# Altium PCB 触摸4B开漏.PCBDOC (part 2 of 2)
Units mm, origin at the board's own origin, x right, y up, seen from the top; angles counter-clockwise.
Board outline 63.63 x 54.48 mm, 2 copper layers (Top Layer, Bottom Layer); 18 components, 31 nets, 63 pads, 27 vias.
Unrouted connection lines stored in the file: 1.
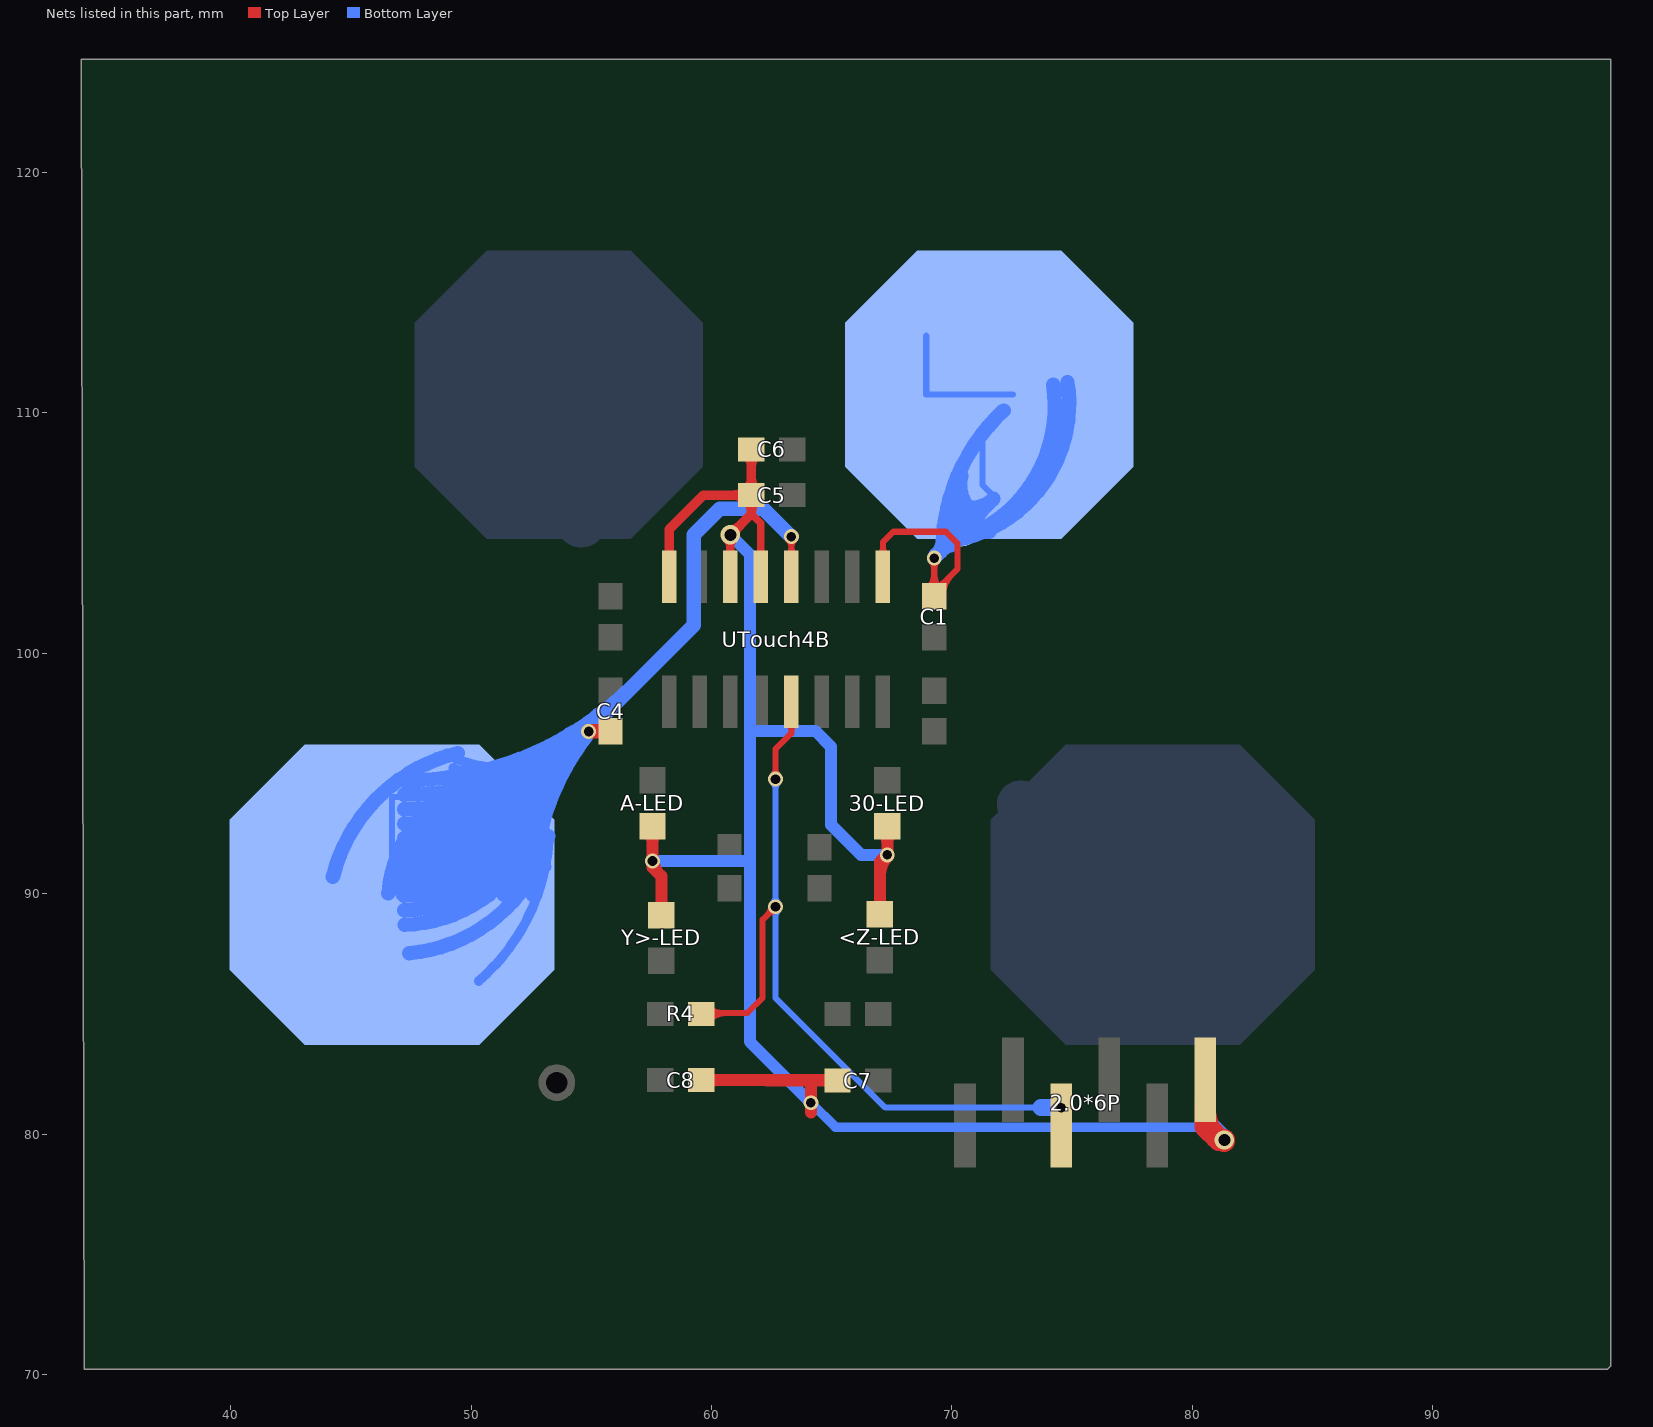
[diagram p2: the nets of this part, all layers, seen from the top]

## Via types
v1: diameter 0.62, hole 0.4, Top Layer to Bottom Layer, 24 vias
v2: diameter 0.8, hole 0.5, Top Layer to Bottom Layer, 2 vias
v3: diameter 0.5, hole 0.35, Top Layer to Bottom Layer, 1 vias

## Nets (pads, with @x,y where several pads share a name; then routed paths per layer and width w, separated by ;. In a path a pad name is that pad's centre, name@x,y a point inside that pad or via, vN(x,y) a via of type N, cw(c..) or ccw(c..) an arc to the next point about the centre after c; other vN are vias at no path point) (continued)
VCC: 2.0*6P.1 30-LED.2 <Z-LED.2 A-LED.2 C5.2 C6.1 C7.1 C8.1 UTouch4B.5 UTouch4B.6 UTouch4B.8 Y>-LED.2 | length 123.5
  Top Layer w0.254: UTouch4B.6@60.782,103.184 v2(60.782,104.927) ; v2@60.589,104.734 cw(c60.123,104.268) UTouch4B.6@60.782,104.268 ; v2@60.589,104.734 cw(c60.123,104.268) UTouch4B.6@60.782,104.268 ; v2@60.589,104.734 cw(c60.123,104.268) UTouch4B.6@60.782,104.268 ; UTouch4B.6@60.647,104.092 ccw(c60.308,104.362) 60.727,104.475 ; UTouch4B.6@60.647,104.092 ccw(c60.308,104.362) 60.727,104.475 ; UTouch4B.6@60.647,104.092 ccw(c60.308,104.362) 60.727,104.475 ; UTouch4B.6@60.782,104.268 cw(c61.441,104.268) v2@60.975,104.734 ; UTouch4B.6@60.782,104.268 cw(c61.441,104.268) v2@60.975,104.734 ; UTouch4B.6@60.782,104.268 cw(c61.441,104.268) v2@60.975,104.734 ; 60.782,104.402 ccw(c61.2,104.402) 60.905,104.106 cw(c61.2,104.402) 60.782,104.402 ; 60.782,104.402 cw(c60.365,104.402) 60.66,104.106 ccw(c60.365,104.402) 60.782,104.402 ; 60.838,104.475 ccw(c61.257,104.362) UTouch4B.6@60.917,104.092 ; 60.838,104.475 ccw(c61.257,104.362) UTouch4B.6@60.917,104.092 ; 60.838,104.475 ccw(c61.257,104.362) UTouch4B.6@60.917,104.092
  Top Layer w0.3: 61.659,105.805 62.052,105.412 UTouch4B.5@62.052,103.184 ; 62.052,104.346 ccw(c62.414,104.346) 62.158,104.09 cw(c62.414,104.346) 62.052,104.346 ; 62.052,104.346 cw(c61.69,104.346) 61.946,104.09 ccw(c61.69,104.346) 62.052,104.346
  Top Layer w0.4: UTouch4B.8@58.242,103.184 58.242,105.156 59.665,106.578 C5.2@61.659,106.578 ; v2(60.782,104.927) 61.659,105.805 C5.2@61.659,106.578 ; C6.1@61.659,108.483 C5.2@61.659,106.578 ; 60.885,106.578 ccw(c60.885,107.303) 61.397,106.791 cw(c60.885,107.303) 60.885,106.578 ; 60.885,106.578 cw(c60.885,105.854) 61.397,106.366 ccw(c60.885,105.854) 60.885,106.578 ; 61.124,105.269 ccw(c61.465,104.927) 60.982,104.927 cw(c61.465,104.927) 61.124,105.269 ; 61.124,105.269 cw(c60.782,105.61) 60.782,105.127 ccw(c60.782,105.61) 61.124,105.269 ; 61.659,105.854 ccw(c60.935,105.854) 61.447,106.366 cw(c60.935,105.854) 61.659,105.854 ; 61.659,105.854 cw(c62.384,105.854) 61.872,106.366 ccw(c62.384,105.854) 61.659,105.854 ; 61.659,107.303 ccw(c62.384,107.303) 61.872,106.791 cw(c62.384,107.303) 61.659,107.303 ; 61.659,107.303 cw(c60.935,107.303) 61.447,106.791 ccw(c60.935,107.303) 61.659,107.303 ; 61.659,107.759 ccw(c60.935,107.759) 61.447,108.271 cw(c60.935,107.759) 61.659,107.759 ; 61.659,107.759 cw(c62.384,107.759) 61.872,108.271 ccw(c62.384,107.759) 61.659,107.759
  Top Layer w0.5: A-LED.2@57.547,92.532 v1(57.547,91.364) 57.547,91.094 57.912,90.729 Y>-LED.2@57.912,89.357 ; C8.1@59.575,82.245 65.227,82.245 C7.1@65.241,82.231 62.281,82.231 ; 64.135,80.899 64.135,82.231 ; <Z-LED.2@67.005,89.357 67.005,91.313 67.315,91.622 30-LED.2@67.315,92.583 ; 67.005,90.737 cw(c68.191,90.737) v1@67.352,91.575 ; 57.547,92.089 ccw(c56.822,92.089) 57.334,92.601 cw(c56.822,92.089) 57.547,92.089 ; 57.547,92.089 cw(c58.271,92.089) 57.759,92.601 ccw(c58.271,92.089) 57.547,92.089 ; 60.228,82.245 ccw(c60.228,81.642) 59.802,82.068 cw(c60.228,81.642) 60.228,82.245 ; 60.228,82.245 cw(c60.228,82.849) 59.802,82.422 ccw(c60.228,82.849) 60.228,82.245 ; 64.587,82.231 ccw(c64.587,82.835) C7.1@65.014,82.408 ; 64.587,82.231 cw(c64.587,81.628) C7.1@65.014,82.055 ; 64.587,82.231 ccw(c64.587,82.835) C7.1@65.014,82.408 ; 64.587,82.231 cw(c64.587,81.628) C7.1@65.014,82.055 ; C7.1@65.014,82.055 ccw(c64.554,81.595) 64.554,82.245 cw(c64.554,81.595) C7.1@65.014,82.055 ; C7.1@65.014,82.408 cw(c64.621,82.802) 64.621,82.245 ccw(c64.621,82.802) C7.1@65.014,82.408 ; 67.315,92.089 ccw(c66.59,92.089) 67.102,92.601 cw(c66.59,92.089) 67.315,92.089 ; 67.315,92.089 cw(c68.039,92.089) 67.527,92.601 ccw(c68.039,92.089) 67.315,92.089 ; v1@57.607,91.364 ccw(c58.402,91.364) 57.84,90.801 cw(c58.402,91.364) v1@57.607,91.364 ; 67.005,91.187 cw(c67.382,91.187) 67.32,91.559 ccw(c67.382,91.187) 67.005,91.187
  Top Layer w0.9: 2.0*6P.1@80.544,80.964 ccw(c82.111,80.964) v2@81.003,79.855 ; 2.0*6P.1@80.543,81.178 80.543,80.315 81.102,79.756 v2(81.331,79.756) ; 80.905,80.024 ccw(c81.494,80.364) v2@81.318,79.708
  Bottom Layer w0.4: v1(64.135,81.305) 65.151,80.289 80.797,80.289
  Bottom Layer w0.5: v1(57.547,91.364) 61.595,91.364 ; v2(60.782,104.927) 61.595,104.115 61.595,96.774 ; v1(64.135,81.305) 61.595,83.845 61.595,91.364 ; v1(67.31,91.618) 66.218,91.618 64.973,92.862 64.973,96.114 64.313,96.774 61.595,96.774 ; 61.595,91.364 61.595,96.774
  Bottom Layer w0.8: 80.797,80.289 v2(81.331,79.756)
Y30-P: C1.1 pad.0@71.547,110.764 pad.2@70.333,105.435 UTouch4B.1 | length 80.7
  Top Layer w0.254: UTouch4B.1@67.132,103.251 67.132,104.623 67.564,105.054 69.748,105.054 70.231,104.572 70.231,103.505 69.093,102.367 C1.1@69.266,102.367 v1(69.266,103.962) ; C1.1@69.002,102.681 ccw(c68.365,103.318) 69.266,103.318 ccw(c70.166,103.318) C1.1@69.53,102.681 ; C1.1@69.266,102.79 ccw(c69.266,103.395) 69.694,102.968 ; C1.1@69.385,102.417 cw(c69.968,102.417) C1.1@69.556,102.83 ; C1.1@69.639,102.417 cw(c70.835,102.417) 69.989,103.263 ; 67.132,104.402 ccw(c67.55,104.402) 67.255,104.106 cw(c67.55,104.402) 67.132,104.402 ; 67.132,104.402 cw(c66.715,104.402) 67.01,104.106 ccw(c66.715,104.402) 67.132,104.402 ; v1@69.136,103.833 cw(c68.824,103.52) 69.266,103.52 ; v1@69.136,103.833 cw(c68.824,103.52) 69.266,103.52 ; v1@69.136,103.833 cw(c68.824,103.52) 69.266,103.52 ; 69.266,103.52 cw(c69.708,103.52) v1@69.395,103.833 ; 69.266,103.52 cw(c69.708,103.52) v1@69.395,103.833 ; 69.266,103.52 cw(c69.708,103.52) v1@69.395,103.833
  Bottom Layer w0.254: pad.0@68.936,113.208 68.936,110.764 pad.0@72.547,110.764 ; pad.0@71.272,108.89 71.272,107.01 71.73,106.553 pad.0@71.73,106.426
  Bottom Layer w0.6: v1@69.327,104.094 ccw(c68.826,104.858) pad.0@69.679,105.185 ; 69.95,104.503 ccw(c69.538,105.131) pad.0@70.239,105.4 ; pad.2@69.952,104.637 ccw(c68.44,110.282) pad.0@74.215,111.178 ; pad.0@70.13,106.448 ccw(c71.024,106.197) pad.0@70.4,105.509 ; pad.0@70.392,107.382 ccw(c71.753,107) pad.0@70.803,105.954 ; pad.0@70.598,104.81 ccw(c69.104,110.385) pad.0@74.808,111.27 ; v1(69.266,103.962) ccw(c68.257,104.971) 69.649,105.283 cw(c68.257,104.971) v1(69.266,103.962) ; v1(69.266,103.962) pad.0@71.73,106.426 ; 69.623,104.643 cw(c77.478,104.314) pad.0@72.156,110.101 ; 69.623,104.643 cw(c77.478,104.314) pad.0@72.156,110.101 ; 69.623,104.643 cw(c77.478,104.314) pad.0@72.156,110.101 ; pad.0@71.73,106.426 cw(c70.855,107.301) 70.521,106.109 ccw(c70.855,107.301) pad.0@71.73,106.426 ; 69.533,104.23 cw(c71.547,102.216) 71.547,105.064 ccw(c71.547,102.216) 69.533,104.23 ; 69.831,104.528 cw(c70.333,104.027) 70.333,104.735 ccw(c70.333,104.027) 69.831,104.528 ; pad.0@71.033,105.435 cw(c71.741,105.435) 71.24,105.937 ccw(c71.741,105.435) pad.0@71.033,105.435
Y>: 2.0*6P.4 R4.1 UTouch4B.13 | length 45.6
  Top Layer w0.254: R4.1@59.575,85.039 61.493,85.039 62.128,85.674 62.128,88.925 v1(62.662,89.459) ; R4.1@59.889,84.736 cw(c60.62,84.005) 60.62,85.039 ; R4.1@59.889,85.264 ccw(c60.431,85.806) 60.431,85.039 ; v1(62.662,94.767) 62.662,96.012 63.322,96.672 UTouch4B.13@63.322,97.984 ; 62.349,89.146 ccw(c62.037,89.459) v1@62.479,89.459 ; 62.349,89.146 cw(c62.662,88.834) v1@62.662,89.276 ; 62.349,89.146 ccw(c62.041,89.457) v1@62.479,89.458 ; 62.349,89.146 ccw(c62.037,89.459) v1@62.479,89.459 ; 62.349,89.146 cw(c62.662,88.834) v1@62.662,89.276 ; 62.349,89.146 cw(c62.66,88.838) v1@62.661,89.276 ; 62.352,89.149 cw(c62.66,88.84) v1@62.661,89.276 ; 62.352,89.149 ccw(c62.049,89.454) v1@62.479,89.457 ; 62.352,89.149 cw(c62.66,88.84) v1@62.661,89.276 ; 62.352,89.149 ccw(c62.043,89.457) v1@62.479,89.458 ; 62.352,89.149 cw(c62.657,88.846) v1@62.66,89.276 ; 62.352,89.149 ccw(c62.043,89.457) v1@62.479,89.458 ; 62.662,95.209 ccw(c63.104,95.209) 62.791,94.897 cw(c63.104,95.209) 62.662,95.209 ; 62.662,95.209 cw(c62.22,95.209) 62.532,94.897 ccw(c62.22,95.209) 62.662,95.209 ; 63.322,96.766 ccw(c62.905,96.766) 63.2,97.062 cw(c62.905,96.766) 63.322,96.766 ; 63.322,96.766 cw(c63.74,96.766) 63.445,97.062 ccw(c63.74,96.766) 63.322,96.766
  Bottom Layer w0.254: v1(62.662,94.767) 62.662,85.674 67.234,81.102 68.332,81.102 73.711,81.102 ; 62.662,89.017 ccw(c62.22,89.017) 62.532,89.329 cw(c62.22,89.017) 62.662,89.017 ; 62.662,89.017 cw(c63.104,89.017) 62.791,89.329 ccw(c63.104,89.017) 62.662,89.017 ; 62.662,89.901 ccw(c63.104,89.901) 62.791,89.588 cw(c63.104,89.901) 62.662,89.901 ; 62.662,89.901 cw(c62.22,89.901) 62.532,89.588 ccw(c62.22,89.901) 62.662,89.901 ; 62.662,94.326 ccw(c62.22,94.326) 62.532,94.638 cw(c62.22,94.326) 62.662,94.326 ; 62.662,94.326 cw(c63.104,94.326) 62.791,94.638 ccw(c63.104,94.326) 62.662,94.326
  Bottom Layer w0.7: 73.711,81.102 v1@74.524,81.102
  other v1: 74.549,81.102
Y>-P: C4.1 pad.0@46.711,89.964 pad.1@51.968,93.929 UTouch4B.4 | length 879.7
  Top Layer w0.254: v1@55.02,96.621 cw(c55.333,96.308) 55.333,96.75 cw(c55.333,97.192) v1@55.02,96.879 ; C4.1@55.8,96.75 C4.1@56.007,96.75 ; UTouch4B.4@63.322,103.184 v1(63.322,104.851) ; v1@63.193,104.722 cw(c62.88,104.409) 63.322,104.409 ; v1@63.193,104.722 cw(c62.88,104.409) 63.322,104.409 ; v1@63.193,104.722 cw(c62.88,104.409) 63.322,104.409 ; 63.322,104.402 ccw(c63.74,104.402) 63.445,104.106 cw(c63.74,104.402) 63.322,104.402 ; 63.322,104.402 cw(c62.905,104.402) 63.2,104.106 ccw(c62.905,104.402) 63.322,104.402 ; 63.322,104.409 cw(c63.764,104.409) v1@63.452,104.722 ; 63.322,104.409 cw(c63.764,104.409) v1@63.452,104.722 ; 63.322,104.409 cw(c63.764,104.409) v1@63.452,104.722
  Top Layer w0.6: v1(54.891,96.75) C4.1@55.8,96.75
  Bottom Layer w0.254: pad.0@46.711,89.964 46.711,94.031 pad.1@52.172,94.031 ; pad.1@52.026,94.322 cw(c51.866,93.228) pad.0@52.941,93.484 ; pad.1@52.108,94.018 52.959,93.167 pad.0@53.2,93.002 ; pad.0@52.547,92.564 53.093,93.11 pad.0@52.997,93.205 ; 54.492,96.402 cw(c54.891,96.003) v1@54.891,96.567 ; 54.614,96.524 ccw(c54.389,96.75) v1@54.708,96.75 ; v1@54.891,96.933 ccw(c54.891,97.252) 55.117,97.027 ; v1@55.074,96.75 cw(c55.638,96.75) 55.239,97.149 ; pad.1@52.172,94.031 pad.0@53.2,93.002 ; pad.1@52.172,94.031 pad.0@52.997,93.205 ; pad.0@52.997,93.205 ccw(c52.731,92.939) 52.501,93.237 cw(c52.731,92.939) pad.0@52.997,93.205 ; pad.0@52.997,93.205 cw(c53.438,93.646) 52.826,93.764 ccw(c53.438,93.646) pad.0@52.997,93.205 ; pad.0@53.2,93.002 ccw(c52.676,92.478) 52.351,93.144 cw(c52.676,92.478) pad.0@53.2,93.002 ; pad.0@53.2,93.002 cw(c54.069,93.87) 52.841,93.905 ccw(c54.069,93.87) pad.0@53.2,93.002 ; 63.01,105.164 cw(c62.697,104.851) v1@63.139,104.851 ; 63.01,105.164 ccw(c63.322,105.476) v1@63.322,105.034 ; 63.01,105.164 ccw(c63.321,105.472) v1@63.322,105.034 ; 63.01,105.164 cw(c62.701,104.853) v1@63.139,104.852 ; 63.01,105.164 ccw(c63.321,105.472) v1@63.322,105.034 ; 63.01,105.164 cw(c62.701,104.853) v1@63.139,104.852 ; 63.01,105.164 ccw(c63.322,105.476) v1@63.322,105.034 ; 63.01,105.164 cw(c62.697,104.851) v1@63.139,104.851 ; 63.01,105.164 ccw(c63.322,105.476) v1@63.322,105.034 ; 63.01,105.164 cw(c62.697,104.851) v1@63.139,104.851 ; 63.013,105.161 cw(c62.703,104.853) 63.139,104.852 ccw(c62.703,104.853) 63.013,105.161 ; 63.013,105.161 ccw(c63.32,105.47) 63.322,105.034 cw(c63.32,105.47) 63.013,105.161 ; pad.0@49.616,94.031 cw(c49.616,91.576) 51.351,93.312 ccw(c49.616,91.576) pad.0@49.616,94.031 ; pad.0@50.106,94.031 ccw(c50.106,95.792) 51.351,94.547 cw(c50.106,95.792) pad.0@50.106,94.031 ; pad.0@50.229,94.031 cw(c50.229,92.19) 51.531,93.492 ccw(c50.229,92.19) pad.0@50.229,94.031 ; pad.0@50.719,94.031 ccw(c50.719,95.178) 51.531,94.367 cw(c50.719,95.178) pad.0@50.719,94.031 ; pad.0@50.842,94.031 cw(c50.842,92.803) 51.71,93.671 ccw(c50.842,92.803) pad.0@50.842,94.031 ; pad.1@52.24,93.373 cw(c52.511,92.816) 52.948,93.254 ccw(c52.511,92.816) pad.1@52.24,93.373
  Bottom Layer w0.4: pad.0@47.281,90.408 ccw(c48.046,95.265) pad.1@52.708,93.703 ; pad.0@47.343,90.803 ccw(c48.12,95.739) pad.1@52.858,94.151 ; pad.0@47.405,91.199 ccw(c48.195,96.213) 53.008,94.6 ; pad.0@47.467,91.594 ccw(c48.27,96.687) 53.159,95.049 ; pad.0@47.841,91.915 ccw(c48.986,95.459) pad.1@52.439,94.063 ; pad.0@47.964,92.295 ccw(c49.119,95.869) pad.1@52.6,94.461 ; pad.0@48.06,89.93 cw(c53.21,89.726) pad.1@51.876,94.704 ; pad.0@48.087,92.676 ccw(c49.251,96.279) 52.761,94.859 ; pad.0@48.46,89.914 cw(c53.778,89.704) 52.401,94.845 ; pad.0@48.859,89.899 cw(c54.347,89.681) 52.925,94.986 ; pad.0@50.197,93.242 cw(c50.873,92.409) pad.1@51.501,93.28 ; pad.0@50.236,95.203 ccw(c51.783,97.883) 52.584,94.894 ; pad.0@50.303,93.634 cw(c50.706,92.936) pad.1@51.34,93.434 ; pad.0@50.315,86.369 ccw(c44.769,92.79) pad.0@53.232,92.171 ; pad.0@50.602,93.572 cw(c51.19,92.848) pad.1@51.735,93.605 ; pad.0@50.703,93.865 cw(c51.073,93.224) pad.1@51.654,93.682 ; pad.0@50.786,92.173 ccw(c49.804,93.261) pad.1@51.204,93.693 ; pad.1@51.168,93.923 ccw(c49.998,93.913) 50.686,94.86 ccw(c51.373,95.807) pad.1@51.726,94.692 ; pad.1@51.17,93.978 ccw(c50.53,94.018) 50.85,94.573 ccw(c51.17,95.129) pad.1@51.525,94.595 ; pad.0@51.222,92.154 ccw(c50.428,92.871) pad.1@51.309,93.476 ; pad.0@51.251,92.594 ccw(c50.465,93.465) pad.1@51.586,93.811 ; pad.0@51.329,92.591 ccw(c50.761,93.019) pad.1@51.329,93.448 ; pad.1@51.426,93.341 cw(c51.229,93.126) 51.462,92.951 cw(c51.834,92.67) pad.1@51.883,93.134 ; pad.1@51.443,93.326 cw(c50.894,92.694) pad.0@51.593,92.233 ; pad.0@51.471,92.779 cw(c52.208,92.224) pad.1@52.08,93.137 ; pad.0@51.561,92.531 ccw(c50.857,93.166) pad.1@51.639,93.703 ; pad.1@51.706,93.627 cw(c51.196,93.042) pad.0@51.844,92.614 ; pad.0@51.901,92.907 ccw(c51.287,93.461) pad.1@51.968,93.929 ; pad.1@52.016,94.326 ccw(c52.141,95.372) 53.079,94.893 ; pad.1@52.095,94.309 ccw(c52.346,95.062) 53.069,94.735 ; pad.1@52.172,94.031 v1(54.891,96.75) ; pad.1@52.368,93.954 cw(c53.458,94.021) 53.062,95.039 ; pad.1@52.397,93.958 ccw(c54.563,93.082) pad.0@52.412,92.17 ; 52.551,94.84 ccw(c52.883,93.986) pad.1@51.968,93.929 ; 52.759,94.853 ccw(c55.82,93.616) pad.0@52.78,92.326 ; 52.887,94.331 cw(c52.205,94.639) pad.1@51.968,93.929 ; 53.022,94.877 cw(c51.767,95.213) pad.1@51.968,93.929 ; 53.037,95.015 ccw(c53.425,93.565) pad.1@51.968,93.929 ; 53.066,94.773 cw(c51.89,95.167) pad.1@51.968,93.929 ; pad.0@49.908,95.046 cw(c49.59,92.001) pad.1@51.968,93.929 ; pad.0@49.908,95.046 cw(c49.59,92.001) pad.1@51.968,93.929 ; pad.0@49.908,95.046 cw(c49.59,92.001) pad.1@51.968,93.929 ; pad.0@50.205,94.658 cw(c50.207,92.164) pad.1@51.968,93.929 ; pad.0@50.205,94.658 cw(c50.207,92.164) pad.1@51.968,93.929 ; pad.0@50.205,94.658 cw(c50.207,92.164) pad.1@51.968,93.929 ; pad.0@50.625,94.007 cw(c50.707,93.472) pad.1@51.216,93.657 ; pad.0@50.625,94.007 cw(c50.707,93.472) pad.1@51.216,93.657 ; pad.0@50.625,94.007 cw(c50.707,93.472) pad.1@51.216,93.657 ; pad.0@50.689,94.017 ccw(c50.541,94.975) pad.1@51.323,94.402 ; pad.0@50.689,94.017 ccw(c50.541,94.975) pad.1@51.323,94.402 ; pad.0@50.689,94.017 ccw(c50.541,94.975) pad.1@51.323,94.402 ; pad.0@50.735,93.253 ccw(c50.301,94.006) pad.1@51.169,93.966 ; pad.0@50.735,93.253 cw(c51.138,92.556) pad.1@51.555,93.245 ; pad.0@50.735,93.253 ccw(c50.301,94.006) pad.1@51.169,93.966 ; pad.0@50.735,93.253 cw(c51.138,92.556) pad.1@51.555,93.245 ; pad.0@50.735,93.253 ccw(c50.301,94.006) pad.1@51.169,93.966 ; pad.0@50.735,93.253 cw(c51.138,92.556) pad.1@51.555,93.245 ; pad.0@50.869,94.946 cw(c50.651,92.861) pad.1@52.279,94.181 ; pad.0@50.869,94.946 cw(c50.651,92.861) pad.1@52.279,94.181 ; pad.0@50.869,94.946 cw(c50.651,92.861) pad.1@52.279,94.181 ; pad.0@51.17,94.659 cw(c51.172,93.131) pad.1@52.251,94.212 ; pad.0@51.17,94.659 cw(c51.172,93.131) pad.1@52.251,94.212 ; pad.0@51.17,94.659 cw(c51.172,93.131) pad.1@52.251,94.212 ; pad.1@51.223,94.219 cw(c52.576,93.693) 52.274,95.113 ; pad.1@51.223,94.219 cw(c52.576,93.693) 52.274,95.113 ; pad.1@51.223,94.219 cw(c52.576,93.693) 52.274,95.113 ; pad.1@51.282,93.518 cw(c50.397,92.986) pad.0@51.291,92.47 ; pad.1@51.282,93.518 cw(c50.397,92.986) pad.0@51.291,92.47 ; pad.1@51.282,93.518 cw(c50.397,92.986) pad.0@51.291,92.47 ; pad.0@51.299,92.484 cw(c52.549,91.763) pad.1@52.175,93.156 ; pad.0@51.299,92.484 cw(c52.549,91.763) pad.1@52.175,93.156 ; pad.0@51.299,92.484 cw(c52.549,91.763) pad.1@52.175,93.156 ; pad.1@51.736,93.164 cw(c51.587,92.676) pad.0@52.084,92.561 ; pad.1@51.736,93.164 cw(c51.587,92.676) pad.0@52.084,92.561 ; pad.1@51.736,93.164 cw(c51.587,92.676) pad.0@52.084,92.561 ; pad.0@51.749,92.872 cw(c52.243,92.587) pad.1@52.129,93.145 ; pad.0@51.749,92.872 cw(c52.243,92.587) pad.1@52.129,93.145 ; pad.0@51.749,92.872 cw(c52.243,92.587) pad.1@52.129,93.145 ; pad.1@51.962,94.329 ccw(c51.936,96.127) 53.469,95.187 ; pad.1@51.962,94.329 ccw(c51.936,96.127) 53.469,95.187 ; pad.1@51.962,94.329 ccw(c51.936,96.127) 53.469,95.187 ; pad.1@51.969,93.529 ccw(c51.967,94.831) 53.173,94.341 ; pad.1@51.969,93.529 ccw(c51.967,94.831) 53.173,94.341 ; pad.1@51.969,93.529 ccw(c51.967,94.831) 53.173,94.341 ; pad.1@51.968,93.929 ccw(c51.966,95.474) 53.397,94.892 ; pad.1@51.968,93.929 cw(c50.811,92.41) pad.0@52.714,92.25 ; pad.1@51.968,93.929 ccw(c51.949,95.266) 53.088,94.567 ; pad.1@51.968,93.929 cw(c53.544,93.735) 52.848,95.162 ; pad.1@51.968,93.929 ccw(c51.966,95.474) 53.397,94.892 ; pad.1@51.968,93.929 cw(c50.811,92.41) pad.0@52.714,92.25 ; pad.1@51.968,93.929 ccw(c51.949,95.266) 53.088,94.567 ; pad.1@51.968,93.929 ccw(c51.966,95.474) 53.397,94.892 ; pad.1@51.968,93.929 cw(c50.811,92.41) pad.0@52.714,92.25 ; pad.1@51.968,93.929 ccw(c51.949,95.266) 53.088,94.567 ; pad.1@51.968,93.929 cw(c53.544,93.735) 52.848,95.162 ; pad.1@51.968,93.929 cw(c53.544,93.735) 52.848,95.162 ; pad.1@52.032,94.324 ccw(c52.186,95.289) 52.977,94.717 ; pad.1@52.032,94.324 ccw(c52.186,95.289) 52.977,94.717 ; pad.1@52.032,94.324 ccw(c52.186,95.289) 52.977,94.717 ; pad.1@52.095,94.719 ccw(c52.3,96.007) 53.358,95.244 ; pad.1@52.095,94.719 ccw(c52.3,96.007) 53.358,95.244 ; pad.1@52.095,94.719 ccw(c52.3,96.007) 53.358,95.244 ; pad.1@52.104,94.718 ccw(c52.315,95.937) 53.028,94.926 ; pad.1@52.104,94.718 ccw(c52.315,95.937) 53.028,94.926 ; pad.1@52.104,94.718 ccw(c52.315,95.937) 53.028,94.926 ; pad.1@52.142,94.71 ccw(c52.255,95.218) 52.535,94.779 ; pad.1@52.142,94.71 ccw(c52.255,95.218) 52.535,94.779 ; pad.1@52.142,94.71 ccw(c52.255,95.218) 52.535,94.779 ; pad.0@52.173,92.944 cw(c52.653,92.833) pad.1@52.392,93.25 ; pad.0@52.173,92.944 cw(c52.653,92.833) pad.1@52.392,93.25 ; pad.0@52.173,92.944 cw(c52.653,92.833) pad.1@52.392,93.25 ; pad.1@52.211,94.247 cw(c51.335,93.097) pad.0@52.775,92.976 ; pad.1@52.211,94.247 cw(c51.335,93.097) pad.0@52.775,92.976 ; pad.1@52.211,94.247 cw(c51.335,93.097) pad.0@52.775,92.976 ; pad.1@52.365,93.88 cw(c54.416,93.628) 53.511,95.485 ; pad.1@52.365,93.88 cw(c54.416,93.628) 53.511,95.485 ; pad.1@52.365,93.88 cw(c54.416,93.628) 53.511,95.485 ; pad.1@52.365,93.979 cw(c53.099,94.071) 52.673,94.675 ; pad.1@52.365,93.979 cw(c53.099,94.071) 52.673,94.675 ; pad.1@52.365,93.979 cw(c53.099,94.071) 52.673,94.675 ; pad.1@52.368,93.905 cw(c53.936,93.808) 53.093,95.134 ; pad.1@52.368,93.905 cw(c53.936,93.808) 53.093,95.134 ; pad.1@52.368,93.905 cw(c53.936,93.808) 53.093,95.134 ; pad.1@52.758,94.057 cw(c53.461,94.17) 52.884,94.587 ; pad.1@52.758,94.057 cw(c53.461,94.17) 52.884,94.587 ; pad.1@52.758,94.057 cw(c53.461,94.17) 52.884,94.587 ; pad.1@52.762,94.028 cw(c53.849,94.164) 53.218,95.059 ; pad.1@52.762,94.028 cw(c53.849,94.164) 53.218,95.059 ; pad.1@52.762,94.028 cw(c53.849,94.164) 53.218,95.059 ; pad.1@52.767,93.88 cw(c54.903,93.748) 53.755,95.555 ; pad.1@52.767,93.88 cw(c54.903,93.748) 53.755,95.555 ; pad.1@52.767,93.88 cw(c54.903,93.748) 53.755,95.555 ; v1@54.89,96.75 ccw(c59.356,92.284) 53.153,91.099 cw(c59.356,92.284) v1@54.89,96.75 ; v1@54.891,96.75 cw(c51.27,100.37) 49.409,95.6 ccw(c51.27,100.37) v1@54.891,96.75 ; pad.0@48.537,93.364 ccw(c49.812,96.633) 52.293,94.152 cw(c49.812,96.633) pad.0@48.537,93.364 ; pad.0@48.682,93.737 ccw(c50.055,97.256) 52.726,94.585 cw(c50.055,97.256) pad.0@48.682,93.737 ; pad.0@48.828,94.11 ccw(c50.298,97.879) 53.159,95.018 cw(c50.298,97.879) pad.0@48.828,94.11 ; pad.0@48.973,94.482 ccw(c50.541,98.501) 53.592,95.451 cw(c50.541,98.501) pad.0@48.973,94.482 ; pad.0@49.119,94.855 ccw(c50.784,99.124) 54.025,95.884 cw(c50.784,99.124) pad.0@49.119,94.855 ; pad.0@49.264,95.228 ccw(c51.027,99.747) 54.458,96.317 cw(c51.027,99.747) pad.0@49.264,95.228 ; pad.0@51.189,90.724 cw(c54.872,91.428) 52.22,94.08 ccw(c54.872,91.428) pad.0@51.189,90.724 ; pad.0@51.582,90.799 cw(c55.769,91.599) 52.754,94.614 ccw(c55.769,91.599) pad.0@51.582,90.799 ; pad.1@51.968,94.329 ccw(c51.968,95.54) 52.825,94.684 cw(c51.968,95.54) pad.1@51.968,94.329 ; pad.1@51.968,94.729 ccw(c51.968,96.906) 53.508,95.367 cw(c51.968,96.906) pad.1@51.968,94.729 ; pad.0@51.974,90.874 cw(c56.666,91.77) 53.288,95.148 ccw(c56.666,91.77) pad.0@51.974,90.874 ; pad.0@52.367,90.949 cw(c57.562,91.942) 53.822,95.682 ccw(c57.562,91.942) pad.0@52.367,90.949 ; pad.0@52.76,91.024 cw(c58.459,92.113) 54.356,96.216 ccw(c58.459,92.113) pad.0@52.76,91.024 ; pad.1@52.768,93.929 cw(c54.454,93.929) 53.262,95.121 ccw(c54.454,93.929) pad.1@52.768,93.929
  Bottom Layer w0.6: pad.0@44.253,90.709 cw(c51.105,88.982) pad.0@49.454,95.853 ; pad.0@46.563,90.022 cw(c52.311,89.506) pad.0@50.817,95.08 ; pad.0@47.161,89.968 cw(c53.222,89.424) 51.647,95.303 ; pad.0@47.212,89.914 ccw(c47.069,96.269) 53.209,94.624 ; pad.0@47.225,89.314 ccw(c47.087,95.436) 53.002,93.851 ; pad.0@47.239,88.714 ccw(c47.106,94.602) pad.0@52.795,93.078 ; pad.0@47.437,87.524 ccw(c46.826,94.108) pad.0@53.212,92.396 ; pad.0@47.51,91.074 ccw(c48.619,95.177) pad.1@52.566,93.602 ; pad.0@47.667,91.653 ccw(c48.795,95.832) pad.1@52.815,94.228 ; pad.0@47.758,89.915 cw(c54.133,89.342) 52.477,95.525 ; pad.0@47.805,91.61 ccw(c49.098,95.194) pad.1@52.526,93.53 ; pad.0@47.823,92.233 ccw(c48.972,96.487) 53.065,94.853 ; pad.0@48.008,92.174 ccw(c49.326,95.825) pad.1@52.817,94.13 ; pad.0@48.212,92.739 ccw(c49.554,96.456) 53.109,94.73 ; pad.0@48.356,89.861 cw(c55.045,89.26) 53.307,95.747 ; pad.0@48.416,93.303 ccw(c49.781,97.087) 53.4,95.33 ; pad.0@49.345,94.87 ccw(c50.925,98.503) pad.1@52.376,94.817 ; pad.0@49.517,90.415 cw(c53.167,91.13) pad.1@51.804,94.591 ; pad.0@49.582,92.522 ccw(c48.419,95.471) pad.1@51.326,94.208 ; pad.0@49.728,93.352 cw(c50.646,92.397) pad.1@51.511,93.399 ; pad.0@49.882,92.17 ccw(c48.262,94.829) pad.1@51.288,94.094 ; pad.0@49.964,93.309 ccw(c49.47,95.512) pad.1@51.377,94.304 ; pad.0@50.106,90.531 cw(c53.886,91.271) 52.474,94.855 ; pad.0@50.203,93.808 cw(c51.078,92.898) pad.1@51.903,93.854 ; pad.0@50.411,93.561 cw(c50.874,92.935) pad.1@51.45,93.458 ; pad.0@50.616,94.616 cw(c50.755,93.4) pad.1@51.877,93.889 ; pad.0@50.678,94.265 cw(c51.51,93.399) pad.1@52.295,94.308 ; pad.0@50.694,90.646 cw(c54.604,91.412) 53.145,95.119 ; pad.0@50.748,93.485 cw(c50.993,92.39) pad.1@51.594,93.338 ; pad.0@50.808,91.711 cw(c53.447,90.746) pad.1@52.263,93.294 ; pad.0@50.929,93.053 ccw(c50.298,94.655) pad.1@51.877,93.969 ; pad.0@50.945,93.955 cw(c51.368,93.384) pad.1@51.894,93.862 ; pad.0@51.119,92.924 ccw(c50.253,94.346) pad.1@51.871,93.953 ; pad.0@51.153,94.721 cw(c51.943,93.899) 52.687,94.762 ; pad.0@51.299,92.113 ccw(c50.409,92.884) pad.1@51.387,93.539 ; pad.0@51.305,93.071 cw(c52.584,92.604) pad.1@52.011,93.839 ; pad.0@51.369,91.999 ccw(c50.321,92.782) pad.1@51.394,93.529 ; pad.1@51.433,93.478 cw(c50.372,92.586) pad.0@51.473,91.744 ; pad.1@51.47,93.89 cw(c52.894,94.003) 52.269,95.287 ; pad.1@51.488,93.42 cw(c51.038,92.943) pad.0@51.563,92.551 ; pad.1@51.502,93.407 cw(c51.151,93.013) pad.0@51.55,92.667 ; pad.0@51.813,92.707 ccw(c51.086,93.337) pad.1@51.885,93.874 ; pad.0@51.866,92.665 ccw(c51.04,93.283) pad.1@51.886,93.872 ; pad.1@51.892,93.865 cw(c50.958,93.079) pad.0@51.928,92.337 ; pad.1@51.902,93.854 cw(c50.079,91.787) pad.0@52.83,91.959 ; pad.1@51.92,93.432 ccw(c52.023,94.486) 53.012,94.108 ; pad.1@51.93,93.837 cw(c51.543,92.916) pad.0@52.535,92.798 ; pad.1@51.937,94.629 ccw(c51.845,96.698) 53.418,95.351 ; pad.1@51.961,94.029 ccw(c51.866,95.308) 53.057,94.832 ; pad.1@51.977,94.629 ccw(c51.986,95.316) 52.603,95.016 ccw(c53.419,94.62) pad.1@52.6,94.23 ; pad.1@52.068,93.917 cw(c53.451,93.741) 52.94,95.038 ; pad.1@52.068,93.937 cw(c53.835,94.078) 53.06,95.672 ; pad.1@52.108,94.018 59.258,101.168 59.258,104.927 60.35,106.02 62.154,106.02 v1(63.322,104.851) ; pad.1@52.121,94.612 ccw(c52.339,95.586) 53.198,95.078 ; pad.1@52.237,94.576 ccw(c52.544,95.318) 53.191,94.842 ; pad.1@52.319,94.535 ccw(c52.755,95.288) 53.08,94.481 ccw(c53.326,93.87) pad.1@52.668,93.899 ; pad.1@52.351,94.251 cw(c51.544,93.572) pad.0@52.382,92.931 ; pad.1@52.658,93.833 ccw(c54.504,93.096) pad.0@52.678,92.312 ; pad.1@52.666,93.981 cw(c54.004,94.081) 53.25,95.191 ; pad.1@52.666,93.983 cw(c53.749,94.067) 52.924,94.773 ; 52.81,94.638 cw(c52.13,94.065) pad.1@52.836,93.525 ; pad.0@52.833,91.911 cw(c56.006,93.009) 52.985,94.476 ; 53.07,94.722 cw(c52.091,95.057) 51.979,94.029 ccw(c52.102,95.297) 53.293,94.843 ; 53.205,94.927 cw(c51.748,95.634) pad.1@51.956,94.028 ; pad.0@49.623,93.295 cw(c50.646,90.786) pad.1@51.697,93.284 ; pad.0@49.623,93.295 cw(c50.646,90.786) pad.1@51.697,93.284 ; pad.0@49.623,93.295 cw(c50.646,90.786) pad.1@51.697,93.284 ; pad.0@49.976,93.005 cw(c51.182,90.939) pad.1@51.79,93.252 ; pad.0@49.976,93.005 cw(c51.182,90.939) pad.1@51.79,93.252 ; pad.0@49.976,93.005 cw(c51.182,90.939) pad.1@51.79,93.252 ; pad.0@50.064,93.981 cw(c50.428,92.87) pad.1@51.392,93.533 ; pad.0@50.064,93.981 cw(c50.428,92.87) pad.1@51.392,93.533 ; pad.0@50.064,93.981 cw(c50.428,92.87) pad.1@51.392,93.533 ; pad.0@50.825,94.231 cw(c51.116,93.343) pad.1@51.886,93.873 ; pad.0@50.825,94.231 cw(c51.116,93.343) pad.1@51.886,93.873 ; pad.0@50.825,94.231 cw(c51.116,93.343) pad.1@51.886,93.873 ; pad.0@50.834,93.505 ccw(c50.336,94.359) pad.1@51.291,94.107 ; pad.0@50.834,93.505 ccw(c50.336,94.359) pad.1@51.291,94.107 ; pad.0@50.834,93.505 ccw(c50.336,94.359) pad.1@51.291,94.107 ; pad.0@50.959,93.84 ccw(c50.706,94.46) pad.1@51.323,94.201 ; pad.0@50.959,93.84 ccw(c50.706,94.46) pad.1@51.323,94.201 ; pad.0@50.959,93.84 ccw(c50.706,94.46) pad.1@51.323,94.201 ; pad.0@50.964,93.842 cw(c51.441,92.674) pad.1@51.93,93.837 ; pad.0@50.964,93.842 cw(c51.441,92.674) pad.1@51.93,93.837 ; pad.0@50.964,93.842 cw(c51.441,92.674) pad.1@51.93,93.837 ; pad.0@51.065,91.797 ccw(c48.921,93.035) pad.1@51.297,93.732 ; pad.0@51.065,91.797 ccw(c48.921,93.035) pad.1@51.297,93.732 ; pad.0@51.065,91.797 ccw(c48.921,93.035) pad.1@51.297,93.732 ; pad.1@51.386,93.54 cw(c49.632,92.368) pad.0@51.626,91.678 ; pad.1@51.386,93.54 cw(c49.632,92.368) pad.0@51.626,91.678 ; pad.1@51.386,93.54 cw(c49.632,92.368) pad.0@51.626,91.678 ; pad.1@51.468,93.927 cw(c52.992,93.933) 52.355,95.317 ; pad.1@51.468,93.927 cw(c52.992,93.933) 52.355,95.317 ; pad.1@51.468,93.927 cw(c52.992,93.933) 52.355,95.317 ; pad.0@51.712,92.917 cw(c52.336,92.557) pad.1@52.15,93.253 ; pad.0@51.712,92.917 cw(c52.336,92.557) pad.1@52.15,93.253 ; pad.0@51.712,92.917 cw(c52.336,92.557) pad.1@52.15,93.253 ; pad.1@51.885,93.874 cw(c50.892,93.21) pad.0@52.021,92.819 ; pad.1@51.885,93.874 cw(c50.892,93.21) pad.0@52.021,92.819 ; pad.1@51.885,93.874 cw(c50.892,93.21) pad.0@52.021,92.819 ; pad.1@51.889,94.625 ccw(c51.58,97.345) 53.76,95.689 ; pad.1@51.889,94.625 ccw(c51.58,97.345) 53.76,95.689 ; pad.1@51.889,94.625 ccw(c51.58,97.345) 53.76,95.689 ; pad.1@51.956,94.028 ccw(c51.697,96.159) 53.553,95.082 ; pad.1@51.956,94.028 ccw(c51.697,96.159) 53.553,95.082 ; pad.1@51.956,94.028 ccw(c51.697,96.159) 53.553,95.082 ; pad.1@51.957,94.029 ccw(c51.799,95.416) 52.912,94.572 ; pad.1@51.957,94.029 ccw(c51.799,95.416) 52.912,94.572 ; pad.1@51.957,94.029 ccw(c51.799,95.416) 52.912,94.572 ; pad.1@52.051,94.624 ccw(c52.151,95.469) 52.677,94.801 ; pad.1@52.051,94.624 ccw(c52.151,95.469) 52.677,94.801 ; pad.1@52.051,94.624 ccw(c52.151,95.469) 52.677,94.801 ; pad.1@52.067,93.91 cw(c54.254,93.489) 53.056,95.367 ; pad.1@52.067,93.91 cw(c54.254,93.489) 53.056,95.367 ; pad.1@52.067,93.91 cw(c54.254,93.489) 53.056,95.367 ; pad.1@52.068,93.93 cw(c54.017,93.937) 53.202,95.707 ; pad.1@52.068,93.93 cw(c54.017,93.937) 53.202,95.707 ; pad.1@52.068,93.93 cw(c54.017,93.937) 53.202,95.707 ; pad.1@52.656,93.797 cw(c56.138,93.126) 54.232,96.117 ; pad.1@52.656,93.797 cw(c56.138,93.126) 54.232,96.117 ; pad.1@52.656,93.797 cw(c56.138,93.126) 54.232,96.117 ; pad.1@52.664,93.847 cw(c55.175,93.549) 53.61,95.536 ; pad.1@52.664,93.847 cw(c55.175,93.549) 53.61,95.536 ; pad.1@52.664,93.847 cw(c55.175,93.549) 53.61,95.536 ; 54.105,96.643 cw(c54.613,95.746) v1@54.888,96.74 ; 54.105,96.643 cw(c54.613,95.746) v1@54.888,96.74 ; 54.105,96.643 cw(c54.613,95.746) v1@54.888,96.74 ; v1@54.889,96.76 ccw(c54.767,97.652) 55.484,97.108 ; v1@54.889,96.76 ccw(c54.767,97.652) 55.484,97.108 ; v1@54.889,96.76 ccw(c54.767,97.652) 55.484,97.108 ; v1@54.901,96.749 cw(c55.94,96.618) 55.298,97.445 ; v1@54.901,96.749 cw(c55.94,96.618) 55.298,97.445 ; v1@54.901,96.749 cw(c55.94,96.618) 55.298,97.445 ; pad.0@47.211,92.314 ccw(c47.211,100.023) 52.662,94.572 cw(c47.211,100.023) pad.0@47.211,92.314 ; pad.0@47.211,92.914 ccw(c47.211,102.071) 53.686,95.596 cw(c47.211,102.071) pad.0@47.211,92.914 ; pad.0@47.211,93.514 ccw(c47.211,104.12) 54.71,96.62 cw(c47.211,104.12) pad.0@47.211,93.514 ; pad.0@47.211,94.114 ccw(c47.211,106.168) 55.735,97.645 cw(c47.211,106.168) pad.0@47.211,94.114 ; pad.0@47.211,94.714 ccw(c47.211,108.217) 56.759,98.669 cw(c47.211,108.217) pad.0@47.211,94.714 ; pad.0@50.761,89.964 cw(c57.295,89.964) 52.675,94.585 ccw(c57.295,89.964) pad.0@50.761,89.964 ; pad.0@51.361,89.964 cw(c59.344,89.964) 53.699,95.609 ccw(c59.344,89.964) pad.0@51.361,89.964 ; pad.0@51.961,89.964 cw(c61.392,89.964) 54.723,96.633 ccw(c61.392,89.964) pad.0@51.961,89.964 ; pad.1@51.968,94.629 ccw(c51.968,96.442) 53.25,95.16 cw(c51.968,96.442) pad.1@51.968,94.629 ; pad.0@52.561,89.964 cw(c63.441,89.964) 55.747,97.657 ccw(c63.441,89.964) pad.0@52.561,89.964 ; pad.1@52.668,93.929 cw(c54.236,93.929) 53.127,95.037 ccw(c54.236,93.929) pad.1@52.668,93.929

## Polygon pours and split planes (outlines as drawn)
GND on Top Layer "Top Layer-No Net" (none, remove dead copper, pour order 4): 47.092,115.8 47.219,115.927 47.219,116.843 47.295,116.843 48.133,117.681 48.252,117.8 49.092,117.8 76.386,117.8 76.556,117.63 77.267,116.919 77.826,116.919 77.826,115.903 78.13,115.598 78.087,115.555 78.087,101.527 78.087,99.285 79.4,97.971 80.645,96.726 81.458,96.726 82.448,96.726 82.728,96.447 82.88,96.294 84.607,96.294 84.658,96.294 86.055,94.897 86.032,94.874 86.032,93.323 86.032,79.939 85.979,79.886 85.623,79.53 85.623,78.743 84.576,78.743 84.032,78.198 84.031,78.199 41.173,78.199 40.321,78.199 40.03,78.489 39.268,79.251 39.268,79.378 39.268,80.067 39.137,80.198 39.137,95.343 39.137,95.706 39.649,96.218 39.792,96.361 40.137,96.361 40.834,96.361 40.869,96.396 42.723,96.396 43.332,96.396 43.637,96.701 44.831,97.895 45.822,97.895 45.822,98.707 46.838,99.723 47.015,99.901 47.015,101.603

## Keep-outs
Keep-Out Layer:
  circle w0.1: c83.251,81.324 r1.45
  circle w0.1: c41.794,81.324 r1.45
  lines w0.1: 40.107,96.454 42.092,96.454 ; 40.137,96.46 ccw(c40.137,95.46) 39.137,95.442 39.137,80.297 ccw(c41.137,80.297) 41.173,78.297 65.253,78.297 ; 42.092,96.464 ccw(c42.092,101.464) 47.092,101.464 ; 47.092,101.515 47.092,115.899 ; 47.092,115.8 cw(c49.092,115.8) 49.092,117.8 76.067,117.8 cw(c76.067,115.78) 78.087,115.78 ; 64.872,78.297 84.032,78.297 ccw(c84.032,80.297) 86.031,80.333 86.032,94.46 ccw(c84.032,94.46) 83.996,96.459 ; 78.087,101.54 78.087,115.887 ; 78.096,101.54 ccw(c83.095,101.456) 83.095,96.456 ; 83.095,96.454 83.996,96.454 ; 55.753,93.166 55.753,94.415 59.639,94.415 59.639,93.166 55.753,93.166 ; 55.956,87.554 59.842,87.554 59.842,88.803 55.956,88.803 55.956,87.554 ; 65.202,87.554 69.037,87.554 69.037,88.803 65.202,88.803 65.202,87.554 ; 65.761,93.166 69.24,93.166 69.24,94.415 65.761,94.415 65.761,93.166

## Silkscreen, mask and mechanical layers (free items; w line width, h text height)
Top Overlay:
  text "K/M" at 58.649,104.851 h0.8 r90
  text "T/Z" at 59.919,104.775 h0.8 r90
  text "TIME" at 57.556,96.342 h0.8 r90
  text "D/D" at 62.433,94.183 h0.8 r90
  text "T/K" at 61.112,94.082 h0.8 r90
  text "VCC" at 81.026,84.582 h1 r90
  text "Y>" at 75.108,83.439 h1 r90
  text "Y30" at 78.892,83.388 h1 r90
  text "GND" at 70.866,82.956 h1 r90
  text "GND" at 49.581,81.509 h1
  text "20190901HFCC" at 44.018,79.324 h1
  text "AM" at 76.987,78.511 h1 r90
  text "<Z" at 73.076,78.486 h1 r90
Bottom Overlay:
  text "AMP" at 54.102,101.981 h1.6
  text "Y30P" at 75.794,101.905 h1.6
  text "Y>-P" at 50.927,81.153 h1.8
  text "<Z-P" at 80.518,80.772 h1.8